# Altium PCB MB1137.PcbDoc (part 3 of 4)
Units mil, origin at the board's own origin, x right, y up, seen from the top; angles counter-clockwise.
Board outline 2760.94 x 5254.68 mil, 6 copper layers (Top Layer, GND, Signal, PWR, GND (Mid2), Bottom Layer), stack 74.545 mil thick; 293 components, 281 nets, 1134 pads, 921 vias.
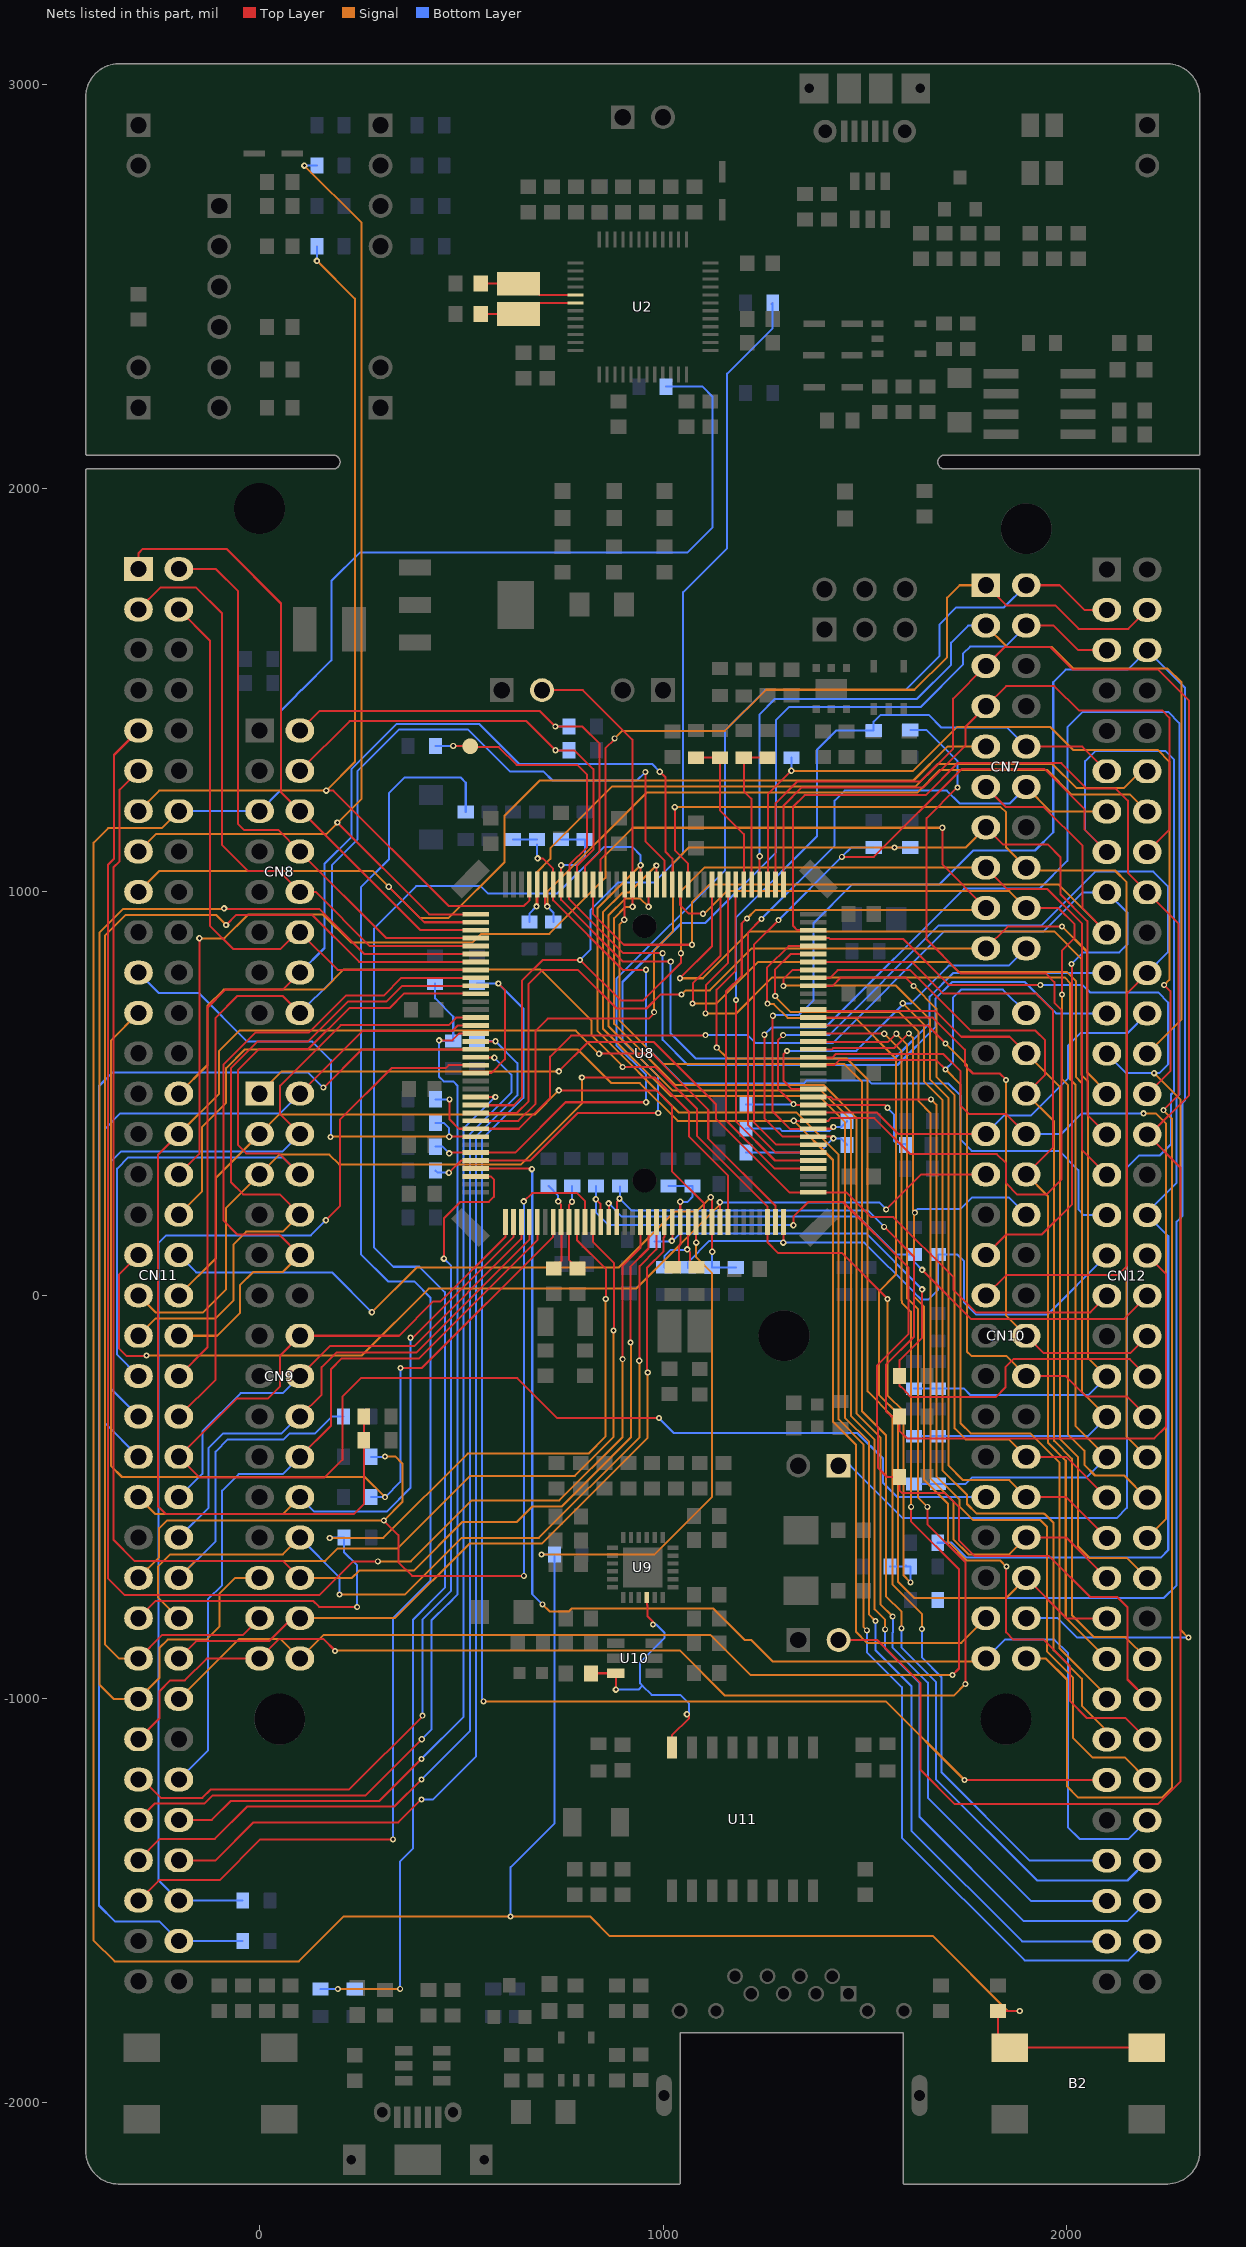
[diagram p7: the nets of this part, all layers, seen from the top]

## Via types
v1: diameter 16, hole 8, Top Layer to Bottom Layer, tented both sides, 464 vias
v2: diameter 15, hole 8, Top Layer to Bottom Layer, tented both sides, 415 vias
v3: diameter 20, hole 12, Top Layer to Bottom Layer, tented both sides, 39 vias
v4: diameter 25.98, hole 12.99, Top Layer to Bottom Layer, tented both sides, 2 vias
v5: diameter 15, hole 8, Top Layer to Bottom Layer, 1 vias

## Nets (pads, with @x,y where several pads share a name; then routed paths per layer and width w, separated by ;. In a path a pad name is that pad's centre, name@x,y a point inside that pad or via, vN(x,y) a via of type N, cw(c..) or ccw(c..) an arc to the next point about the centre after c; other vN are vias at no path point) (continued)
NRST: B2.2 B2.3 C53.2 CN8.5 CN11.14 SB111.2 SB177.1 U8.25 | length 10367.8
  Top Layer w5: v1@1081.95,134 U8.25@1081.95,181.69 ; v1(1884,-1773.5) C53.2@1830,-1773.5 1830,-1835.69 B2.2@1858.72,-1864.42 B2.3@2199.28,-1864.42
  Signal w5: CN11.14@-200,1200 -242.03,1157.97 -375.03,1157.97 -411,1122 -411,-1599 -359.4,-1650.6 97.4,-1650.6 209,-1539 v2(622,-1539) 818.86,-1539 868.07,-1588.21 1669.21,-1588.21 1854.5,-1773.5 v1(1884,-1773.5) ; v2(699,-642) 979.21,-642 1121,-500.21 1121,55.91 1081.95,94.95 v1@1081.95,134
  Bottom Layer w5: CN11.14@-200,1200 CN8.5@0,1200 53.17,1253.17 53.17,1449.17 91.6,1487.6 91.6,1489.04 102.96,1500.4 104.4,1500.4 178,1574 178,1770.5 248.5,1841 1060,1841 1122,1903 1122,2227.85 1097.85,2252 SB111.2@1007.75,2252 ; v2(622,-1539) 622,-1417 731.25,-1307.75 SB177.1@731.25,-642 v2(699,-642)
  other v1: 1082,131
OSC_IN: C5.1 U2.5 X1.2 | length 245.1
  Top Layer w5: C5.1@548.5,2508 X1.2@641.4,2508 ; X1.2@642,2507.4 665.6,2507.4 693.47,2479.53 U2.5@782.68,2479.53
OSC_OUT: C6.1 U2.6 X1.1 | length 245.1
  Top Layer w5: C6.1@548.5,2432 X1.1@641.4,2432 ; X1.1@642,2432.6 665.6,2432.6 692.84,2459.84 U2.6@782.68,2459.84 U2.6@782.52,2460
PA0: CN11.28 SB179.1 SB180.2 U8.34 | length 3240.6
  Top Layer w5: v5(900,566) 980.34,566 1084.3,462.04 1084.3,394.85 1259.12,220.03 U8.34@1259.12,181.69 1259.12,131.04 1284.74,105.42 1442.58,105.42 1557,-9 v2(1556,-9)
  Signal w5: CN11.28@-200,500 -129,571 -129,718 -89.03,757.97 158.97,757.97 209.1,808.1 695.91,808.1 823,681.01 823,644.77 900,567.77 v5(900,566) ; v2(1556,-9) 1556,-247.44 1596.1,-287.54 1596.1,-694.1 v2(1613,-711)
  Bottom Layer w5: SB180.2@1562.75,-672 SB179.1@1613.25,-672 1613.25,-710.75 v2(1613,-711) ; SB179.1@1601,-669 SB179.1@1602,-670
PA1: CN11.30 SB11.2 SB13.2 U8.35 | length 3583.2
  Top Layer w5: CN11.30@-200,400 -252,348 -252,-522 -231.97,-542.03 233.72,-542.03 258.25,-517.5 SB13.2@258.25,-374 ; SB13.2@258.25,-359 SB11.2@258.25,-299.97 ; v1@841.33,600 971.77,600 1112,459.77 1112,388.36 1278.8,221.56 U8.35@1278.8,181.69
  Signal w5: CN11.30@-200,400 -100,500 -100,606 -50,656 783.72,656 v1@840.72,599
  other v1: 841.33,599
PA2: CN12.35 SB159.1 SB160.2 U8.36 | length 1471.5
  Top Layer w5: v1(1298,131) 1298,134 1298.49,134.49 U8.36@1298.49,181.69
  Bottom Layer w5: SB160.2@1062,67.75 SB160.2@1062,69.75 1062,82.01 1114.99,135 1300.04,135 v1@1304.04,131 ; v1(1298,131) v1@1304.04,131 ; CN12.35@2100,99 1954,-47 1775.25,-47 1746,-17.75 1746,85 1729.75,101.25 SB159.1@1681,101.25 1681,13 1658,-10 1639.26,-10 1622.6,6.66 1622.6,7.4 1499,131 v1@1304.04,131
PA3: CN9.1 CN12.37 U8.37 | length 2488.6
  Top Layer w5: v1(742,555) 815,628 977.3,628 1131,474.3 1131,437.31 1313.61,254.7 1371.49,254.7 U8.37@1372.31,255.51 1454.49,255.51 1515.9,194.1 1570.9,194.1 1720,45 1720,13.13 1775.16,-42.03 1917.41,-42.03 ; 1917.44,-42 2059,-42 CN12.37@2100,-1
  Signal w5: CN9.1@0,500 55,555 v1(742,555)
PA4: CN7.17 CN11.32 U8.40 | length 4286.7
  Top Layer w5: CN11.32@-200,300 -149,351 v1(-149,885) ; v2(1208,934) 1207,934 1195,922 1195,792.38 1156,753.38 1156,434.54 1275.84,314.7 1372.18,314.7 U8.40@1372.31,314.57 ; v2(1692,1159) 1692,1068 CN7.17@1800,960
  Signal w5: v1(-149,885) -87,885 -28,944 157,944 227,874 527,874 549,896 718,896 857,1035 857,1091.28 924.72,1159 v2(1692,1159) ; v2(1208,934) 1229.52,955.52 1795.52,955.52 CN7.17@1800,960
  Bottom Layer w5: v2@1207,934 v2(1208,934)
PA5: CN7.10 CN12.11 SB119.2 U8.41 | length 2064.8
  Top Layer w5: v2(1181,732) 1181,430.75 1277.5,334.25 U8.41@1372.31,334.25 ; CN7.10@1900,1360 2039,1360 CN12.11@2100,1299
  Bottom Layer w5: v2(1181,732) 1183.5,732 1181,734.5 1181,937.47 1382,1138.47 1382,1353 1429,1400 SB119.2@1522,1400 1522,1422 1539,1439 1658,1439 1690,1407 1853,1407 CN7.10@1900,1360
PA6: CN7.12 CN12.13 U8.42 | length 1823.9
  Top Layer w5: v2(1244,933) 1210,899 1210,422.96 1279.03,353.94 U8.42@1372.31,353.94
  Signal w5: CN7.12@1900,1260 1961,1199 CN12.13@2100,1199
  Bottom Layer w5: v2(1244,933) 1425,1114 1425,1226 1450,1251 1703.05,1251 1735.05,1219 1859,1219 CN7.12@1900,1260
PA7: CN12.15 JP6.1 SB121.2 U8.43 | length 5093.1
  Top Layer w5: v2(1286.03,930) 1225,868.97 1225,429.18 1280.56,373.62 U8.43@1372.31,373.62 ; v2(1443.03,1087) 1522.65,1087 1740.82,1305.17 1944.83,1305.17 2044,1206 2044,1155 CN12.15@2100,1099
  Bottom Layer w5: v2(1286.03,930) v2(1443.03,1087) 1466.03,1110 SB121.2@1522,1110 ; JP6.1@1409.99,-422 JP6.1@1435,-422 1464,-422 1594,-552 2124,-552 2149.6,-526.4 2149.6,316.6 2180,347 2231.53,347 2258.9,374.37 2258.9,497.88 2265.9,504.87 2265.9,1328.63 2245.53,1349 2071,1349 2046,1324 2046,1153 CN12.15@2100,1099
PA8: CN12.23 SB115.2 TP1.1 U8.100 | length 2527.4
  Top Layer w5: v2(480,1362) 481,1361 TP1.1@522,1361 ; TP1.1@522,1359 TP1.1@522,1361 ; TP1.1@522,1366 TP1.1@522,1361 ; v2(999,848) 900.92,848 766.99,981.93 U8.100@766.99,1018.31 767.81,1019.12 767.81,1066.81 812,1111 812,1290 787,1315 637,1315 593,1359 524,1359 TP1.1@522,1361
  Bottom Layer w5: SB115.2@435.75,1362 v2(480,1362) ; v2(999,848) 999,633.26 1061.26,571 1581,571 1675,665 1675,735.29 1716.49,776.78 1896.56,776.78 1974.34,699 CN12.23@2100,699
PA9: CN12.21 SB127.2 SB128.2 U8.101 | length 2003.2
  Top Layer w5: v1(747.31,1066.32) U8.101@747.31,1018.31 747.31,980.4 900.71,827 v2(1019,827)
  Bottom Layer w5: v1(747.31,1066.32) 786.58,1066.32 806,1085.73 SB127.2@806,1130.25 SB128.2@747,1130.25 SB128.2@747.31,1129.94 ; v2(1019,827) 1019,649 1080.9,587.1 1573.62,587.1 1660.52,674 1660.52,740.46 1719.05,799 CN12.21@2100,799
PA10: CN12.33 SB125.2 SB126.2 U8.102 | length 2156.6
  Top Layer w5: v1(689,1083) 702,1083 727.62,1057.38 U8.102@727.62,1018.31 727.62,978.87 899.49,807 v2(958,807)
  Bottom Layer w5: SB125.2@628.42,1130.25 SB126.2@688,1130.25 ; v1@688,1083.72 SB126.2@688,1117.5 ; v2(958,807) 958,615.69 1048.69,525 1348.5,525 1356.5,533 1509,533 1517,525 1707.42,525 1737.5,494.92 1737.5,385.25 1764.75,358 1981.49,358 2029,310.49 2029,213 2043,199 CN12.33@2100,199
PA11: CN12.14 SB133.2 U8.103 | length 1791.9
  Top Layer w5: U8.103@707.94,1018.31 707.94,969.06 v1(713,964)
  Signal w5: v1(713,964) 713,1000 959,1246 1630,1246 1686.03,1302.03 1951.97,1302.03 2012.03,1241.97 2157.03,1241.97 CN12.14@2200,1199
  Bottom Layer w5: v1(713,964) 728,949 SB133.2@728,925.5
PA12: CN12.12 SB132.2 U8.104 | length 1868
  Top Layer w5: v1(686.28,964) 688.25,965.97 U8.104@688.25,1018.31
  Signal w5: v1(686.28,964) 686.28,1047.28 720.73,1081.73 720.73,1108.43 873.3,1261 1625.34,1261 1681.37,1317.03 1939.54,1317.03 1939.96,1316.6 1956.04,1316.6 1956.46,1317.03 1964.97,1317.03 2025.03,1256.97 2142.03,1256.97 2184.06,1299 CN12.12@2200,1299
  Bottom Layer w5: SB132.2@668.57,925.5 668.57,946.28 v1(686.28,964)
PA13: CN11.13 SB108.1 U8.105 | length 2571.8
  Top Layer w5: v1(165,1251) 183,1251 469,965 655,965 668.57,978.57 U8.105@668.57,1018.31
  Signal w5: CN11.13@-300,1200 -249,1251 v1(165,1251) 236,1322 236,2470 v1(142.25,2563.75)
  Bottom Layer w5: SB108.1@142.25,2600 v1(142.25,2563.75) v1@143,2563
PA14: CN11.15 SB103.1 U8.109 | length 2705.2
  Top Layer w5: v1@193,1174 v1(193,1172.03) 420.54,944.49 U8.109@535.69,944.49
  Signal w5: CN11.15@-300,1100 -257.03,1142.97 164.97,1142.97 253,1231 253,2658.06 v1(111.06,2800)
  Bottom Layer w5: v1(111.06,2800) SB103.1@142.25,2800
PA15: CN7.9 CN11.17 U8.110 | length 2665.6
  Top Layer w5: v1(320,1013) 408.2,924.8 U8.110@535.69,924.8
  Signal w5: CN11.17@-300,1000 -248,1052 281,1052 v1(320,1013) 398,935 468,935 607,1074 607,1189 694,1276 1620.69,1276 1704.69,1360 CN7.9@1800,1360
PB0: CN10.31 CN11.34 SB120.1 U8.46 | length 5869.6
  Top Layer w5: v1(1324,432.68) U8.46@1372.31,432.68 1409.37,432.68 1416,439.3 1523.88,439.3 1613.24,349.94 1827.31,349.94 1850,327.25 1850,278 1878.06,249.94 1949.94,249.94 1988,288 1988,706.64 1969.53,725.11 1969.53,776.47 1948,798 1737,798 1653,882 1653,1182.87 1729.13,1259 v2(1730,1259)
  Signal w5: CN11.34@-200,200 -142.12,257.88 -142.12,417.88 -83,477 -83,563 -36.5,609.5 788.66,609.5 872.16,526 942.62,526 1035.95,432.68 v1(1324,432.68) 1421.1,335.58 1421.1,-313.12 1478.1,-370.12 1478.1,-834.04 1505.06,-861 1739,-861 CN10.31@1800,-800
  Bottom Layer w5: SB120.1@1612.75,1401.75 1651.75,1401.75 1730,1323.5 v2(1730,1259)
PB1: CN10.7 CN12.24 U8.47 | length 1022
  Top Layer w5: U8.47@1372.31,452.36 1373.15,453.2 1529.64,453.2 1582.84,400 CN10.7@1800,400
  Bottom Layer w5: CN10.7@1800,400 1846,446 1912,446 2003,537 2003,619 2034,650 2151,650 CN12.24@2200,699
PB2: CN10.15 CN12.22 R73.1 SB137.2 U8.48 | length 3207.7
  Top Layer w5: 1298.5,498.55 1325,472.05 U8.48@1372.31,472.05 1548.95,472.05 v2(1556,465) v2@1557,465 ; v2@1298.5,644.28 v2(1297.78,645) 1284.6,631.82 1284.6,512.4 v2(1323,474) ; CN10.15@1800,0 1850,50 2126,50 2150,74 2150,749 CN12.22@2200,799
  Bottom Layer w5: SB137.2@1205.75,473 1324.05,473 1324,473.05 1324,474 v2(1323,474) ; v2(1297.78,645) 1411.45,645 1683.48,917.03 1938.03,917.03 2071,1050 2215,1050 2251,1014 2251,850 CN12.22@2200,799 ; v2(1556,465) 1572.87,448.13 1572.87,382.13 1580,375 1600.5,375 R73.1@1602.5,373
PB3: CN7.15 CN12.31 SB110.2 U8.133 | length 4690.2
  Top Layer w5: U8.133@536.51,471.23 630.23,471.23 650,491 650,779.75 701.25,831 v2(794,831) 795.28,831 895.28,731 951.28,731 1044.07,823.79 v2(1044.07,848) ; CN7.15@1800,1060 1853,1007 1952.69,1007 2037.85,921.84 2037.85,361.16 CN12.31@2100,299
  Signal w5: v2(1044.07,848) 1044.07,1001.74 1102.33,1060 CN7.15@1800,1060
  Bottom Layer w5: v2(794,831) 819.7,856.7 819.7,954.7 888,1023 977,1023 1049.71,1095.71 1049.71,1742.71 1159,1852 1159,2284.39 1271.75,2397.14 SB110.2@1271.75,2460 SB110.2@1269,2457.25
PB4: CN7.19 CN12.27 U8.134 | length 2357.3
  Top Layer w5: U8.134@535.69,452.36 638,452.36 667,481.36 667,772.01 701.99,807 788.99,807 884.99,711 959,711 994,746 v2(1046,746) ; CN7.19@1800,860 1854,914 v2(1989,914)
  Signal w5: v2(1046,746) 1056,756 1115.75,756 1219.75,860 CN7.19@1800,860 ; v2(1989,914) 2050.7,852.3 2050.7,552.93 2100,503.63 CN12.27@2100,499
  Bottom Layer w5: CN12.27@2100,499 CN12.27@2100,501
PB5: CN7.13 CN12.29 SB122.2 U8.135 | length 2851.4
  Top Layer w5: U8.135@535.69,432.68 641.31,432.68 684,475.36 684,656 714,686 965,686 978,699 v2(978,702) ; CN7.13@1800,1160 1843,1117 1954.35,1117 1985,1086.35 1985,994.34 2051.75,927.6 2051.75,447.26 CN12.29@2100,399
  Signal w5: v2(978,702) 978,855.28 1025,902.28 1025,1071 1064,1110 v2(1573.62,1110) 1750,1110 CN7.13@1800,1160
  Bottom Layer w5: v2(1573.62,1110) SB122.2@1612.75,1110
PB6: CN10.13 CN12.17 SB136.2 U8.136 | length 3216.7
  Top Layer w5: v2(471,485.95) 471,435.99 494,412.99 U8.136@535.69,412.99 642.84,412.99 720,490.15 720,591.98 772.02,644 1104,644 v2(1105,645) ; CN10.13@1800,100 1851,151 1939,151 2013,225 2013,820.03 v2(2012.03,821)
  Signal w5: CN12.17@2096.97,1002.03 CN12.17@2100,999
  Bottom Layer w5: SB136.2@435.75,486 470.95,486 v2(471,485.95) ; v2(1105,645) 1210,645 1228.9,626.1 1421.37,626.1 1697.3,902.03 1943.03,902.03 2040,999 CN12.17@2100,999 2151,948 2151,869.99 2131.01,850 2041.03,850 v2(2012.03,821)
PB7: CN11.21 SB139.1 U8.137 | length 1171.2
  Top Layer w5: v1@477,393.31 U8.137@535.69,393.31
  Signal w5: v2(176,392.5) 177,393.5 v1@470,393.5
  Bottom Layer w5: CN11.21@-300,800 -249.5,749.5 -150.5,749.5 -30,629 96,629 130.69,629 176.9,582.79 176.9,393.4 v2(176,392.5) ; SB139.1@436,427 457.28,427 461.3,422.97 470,414.28 v1(470,393)
PB8: CN7.2 CN12.3 SB138.2 U8.139 | length 2811.6
  Top Layer w5: v1(470,352) 471.94,353.94 U8.139@535.69,353.94 633.5,353.94 758.27,478.7 v1(958,478.7) ; CN7.2@1900,1760 1983,1760 2044,1699 CN12.3@2100,1699
  Bottom Layer w5: SB138.2@435.75,368.5 453.5,368.5 v1(470,352) ; v1(958,478.7) 958,546.76 884.49,620.26 884.49,784.49 1154,1054 1154,1400.91 1252.86,1499.78 1599.78,1499.78 1684.5,1584.5 1684.5,1662.59 1726.91,1705 1845,1705 CN7.2@1900,1760
PB9: CN7.4 CN12.5 SB143.2 U8.140 | length 2776.8
  Top Layer w5: v1@469.32,304.25 499.31,334.25 U8.140@535.69,334.25 671.25,334.25 789,452 v1(988,452) ; CN7.4@1900,1660 1968,1660 2029,1599 CN12.5@2100,1599
  Bottom Layer w5: SB143.2@435.75,309.5 441.25,304 v1(469.32,304) ; v1(988,452) 988,543.26 899.49,631.76 899.49,776.78 1045.72,923 1104.94,923 1280,1098.06 1280,1426.12 1311.88,1458 1638,1458 1743.93,1563.93 1743.93,1590.93 1761,1608 1848,1608 CN7.4@1900,1660
PB10: CN10.32 CN12.25 U8.69 | length 3135.7
  Top Layer w5: U8.69@1372.31,885.43 1411.57,885.43 1413.5,883.5 1594.56,883.5 1709.06,769 v2(1935,769)
  Signal w5: v1(2217,551) 2282,486 2282,-828 v2(2302,-848)
  Bottom Layer w5: CN10.32@1900,-800 1978,-800 2026,-848 v2(2302,-848) ; v2(1935,769) 2040,769 2058,751 2226.79,751 2252,725.79 2252,573 2230,551 v1(2217,551) 2148,551 CN12.25@2100,599
PB11: CN10.34 CN12.18 U8.70 | length 4454.3
  Top Layer w5: U8.70@1372.31,905.12 1332.88,905.12 1322.1,915.9 1322.1,1211.1 1351,1240 1650.69,1240 1729.76,1319.07 1986.83,1319.07 2049.91,1256 2122,1256 2152,1226 2152,1047 CN12.18@2200,999 2278,921 2278,496.99 v2(2240,459)
  Signal w5: CN10.34@1900,-900 1949,-900 2001,-952 2001,-1217 2027.97,-1243.97 2237.03,-1243.97 2261,-1220.01 2261,438 v2(2240,459)
PB12: CN7.7 CN12.16 U8.73 | length 1690.4
  Top Layer w5: U8.73@1298.49,1018.31 1298.5,1213.96 1343.39,1258.85 1645.84,1258.85 1750,1363.01 1750,1410 CN7.7@1800,1460 1850,1510 1970,1510 2031,1449 2238,1449 2255,1432 2255,1154 CN12.16@2200,1099
PB13: CN7.5 CN12.30 JP7.2 U8.74 | length 5439.3
  Top Layer w5: U8.74@1278.8,1018.31 1278.8,1219.93 1332.45,1273.57 1637.91,1273.57 1719,1354.66 1719,1479 CN7.5@1800,1560 1847,1607 1959.06,1607 2015.06,1551 2226.79,1551 2304,1473.79 2304,496.26 2206.74,399 CN12.30@2200,399 2282,317 2282,-1205 2226.93,-1260.07 2077.14,-1260.07 2076.49,-1260.72 1722.72,-1260.72 1638.15,-1176.15 1638.15,-961.35 1530.8,-854 JP7.2@1435,-854
PB14: CN12.28 SB118.1 U8.75 | length 2214.4
  Top Layer w5: U8.75@1259.93,1019.12 1259.93,1241.93 v1(1318,1300) ; CN12.28@2200,499 2257,556 2257,754.03 v2(2242.03,769)
  Signal w5: v1(1318,1300) 1620,1300 1729,1409 1959,1409 2016,1352 2226,1352 2255,1323 2255,781.97 v2(2242.03,769)
  Bottom Layer w5: v1(1318,1300) SB118.1@1318,1332.5
PB15: CN7.3 CN12.26 U8.76 | length 2604.3
  Top Layer w5: U8.76@1239.43,1018.31 v1(1239.43,1088.43)
  Signal w5: CN7.3@1800,1660 1853,1607 1963,1607 2016,1554 2250,1554 2285,1519 2285,684 CN12.26@2200,599
  Bottom Layer w5: v1(1239.43,1088.43) 1239.43,1440.12 1277.31,1478 1629,1478 1714,1563 1714,1618 1756,1660 CN7.3@1800,1660
PC0: CN9.3 CN11.38 U8.26 | length 1886
  Top Layer w5: v1(742,508) 983,508 1022,469 1022,307.43 1101.64,227.79 U8.26@1101.64,181.69
  Signal w5: CN11.38@-200,0 -108,92 -108,292 CN9.3@0,400 48,448 682,448 v1(742,508)
PC1: CN11.36 SB164.2 SB165.2 U8.27 | length 1732.7
  Top Layer w5: v1@1118.1,246.96 v1(1118.1,243) 1121.32,239.78 U8.27@1121.32,181.69 ; U8.27@1120.51,182.51 U8.27@1121.32,181.69 ; v1@1121.32,108.68 U8.27@1121.32,181.69
  Signal w5: v1(278.53,-42.03) 389.75,69.19 890.19,69.19 1028.43,207.43 1082.53,207.43 v1(1118.1,243)
  Bottom Layer w5: CN11.36@-200,100 -157.03,57.03 179.47,57.03 v1(278.53,-42.03) ; v1@1121.53,107.53 1121.53,69.56 SB165.2@1180.53,69.56
  other v1: 1122,108
PC2: CN10.9 CN11.35 U8.28 | length 2668.5
  Top Layer w5: CN11.35@-300,100 -348.03,51.97 -348.03,-131.97 -330,-150 -281,-150 v2(-280,-149) ; U8.28@1141.01,181.69 v1(1141.01,230.69) ; v2(1553,213) 1640,300 CN10.9@1800,300
  Signal w5: v2(-280,-149) 253,-149 419,17 932.99,17 1141.01,225.02 v1(1141.01,230.69)
  Bottom Layer w5: v1(1141.01,230.69) 1535.31,230.69 v2(1553,213) ; CN10.9@1800,300 CN10.9@1807.72,300
PC3: CN9.5 CN11.37 U8.29 | length 2114.2
  Top Layer w5: v1(799,540) 979.69,540 1064,455.69 1064,394 1161.51,296.49 1161.51,216
  Signal w5: CN11.37@-300,0 -257.97,-42.03 -140.03,-42.03 -83,15 -83,217 CN9.5@0,300 49,349 173,349 197.5,324.5 648.5,324.5 799,475 v1(799,540)
PC4: CN12.34 SB150.2 SB151.1 SB178.2 U8.44 | length 4934.2
  Top Layer w5: v2(1251,646) 1251,439.3 1297,393.31 U8.44@1372.31,393.31 1417.89,393.31 v1(1422.2,389)
  Bottom Layer w5: SB150.2@1205.75,354 1387.2,354 v1(1422.2,389) 1440.25,389 SB151.1@1456.25,373 ; v2(1251,646) 1269,664 1402,664 1746,1008 1933,1008 2002,1077 2002,1408 2040,1446 2252,1446 2279.8,1418.2 2279.8,497.56 2272.8,490.56 2272.8,279.01 2200,206.2 CN12.34@2200,199 2252,147 2252,-631 2233,-650 1752,-650 1715,-613 SB178.2@1680.75,-613
PC5: CN12.6 SB140.2 SB141.1 SB181.2 U8.45 | length 5272.9
  Top Layer w5: v2@1270.7,692.7 1270.7,456.99 1315.51,412.18 1371.49,412.18 U8.45@1372.31,412.99 1417.89,412.99 v1(1422.2,417.3)
  Bottom Layer w5: SB140.2@1205.75,414 1288.75,414 1295.75,407 1411.21,407 1421.5,417.3 v1(1422.2,417.3) 1441.55,417.3 SB141.1@1456.25,432 ; v2@1273,695 1336,695 1373,732 1373,923 1467.99,1017.99 1683.89,1017.99 1768.51,1102.61 1921.79,1102.61 1967.03,1147.84 1967.03,1520.03 1998,1551 2152,1551 CN12.6@2200,1599 2293.7,1505.3 2293.7,483.43 2286.7,476.43 2286.7,196.7 2273,183 2273,-718 2241,-750 SB181.2@1680.75,-750
  other v2: 1272,693
PC6: CN7.1 CN12.4 U8.96 | length 2003.8
  Top Layer w5: U8.96@845.5,1018.54 845.5,1080.86 857,1092.36 857,1355.5 880,1378.5 v2(880,1380.53) ; CN7.1@1800,1760 1850,1710 1972,1710 2030,1652 2153,1652 CN12.4@2200,1699
  Signal w5: v2(880,1380.53) 898.47,1399 1153.37,1399 1255.37,1501 1623,1501 1704,1582 1704,1729 1735,1760 CN7.1@1800,1760
PC7: CN7.11 CN12.19 U8.97 | length 2091.4
  Top Layer w5: U8.97@826.05,1018.31 826.05,945.76 902.8,869 v2(1071.47,869) ; CN7.11@1800,1260 1849.84,1210.16 1943.84,1210.16 2040,1114 2040,959 CN12.19@2100,899
  Signal w5: v2(1071.47,869) 1071.47,974.47 1114.97,1017.97 1981.03,1017.97 CN12.19@2100,899
PC8: CN8.2 SB116.1 U8.98 | length 1194
  Top Layer w5: CN8.2@100,1400 148,1448 695,1448 v2(733,1410) 800,1410 842,1368 842,1098.57 806.36,1062.94 U8.98@806.36,1018.31
  Bottom Layer w5: v2(733,1410) SB116.1@767.5,1410
PC9: CN8.4 SB117.1 U8.99 | length 1163.6
  Top Layer w5: CN8.4@100,1300 223,1423 661.5,1423 v2(733.5,1351) 780,1351 827,1304 827,1104.79 786.68,1064.46 U8.99@786.68,1018.31
  Bottom Layer w5: v2(733.5,1351) SB117.1@767.5,1351
PC10: CN8.6 CN11.1 U8.111 | length 1544.8
  Top Layer w5: CN11.1@-300,1800 -300,1839 -289,1850 -82,1850 53.17,1714.83 53.17,1246.83 CN8.6@100,1200 103.99,1200 398.87,905.12 U8.111@535.69,905.12
PC11: CN8.8 CN11.2 U8.112 | length 1452.5
  Top Layer w5: CN11.2@-200,1800 -108,1800 -53,1745 -53,1168 -39,1154 46,1154 CN8.8@100,1100 314.57,885.43 U8.112@535.69,885.43
PC12: CN8.10 CN11.3 U8.113 | length 1562.2
  Top Layer w5: CN11.3@-300,1700 -246,1754 -157,1754 -93,1690 -93,1116 -29,1052 48,1052 CN8.10@100,1000 139,1000 273.25,865.75 U8.113@535.69,865.75
PC13: CN11.23 SB173.1 U8.7 | length 2783.4
  Top Layer w5: v2(349,-180) 402.31,-180 727.62,145.31 U8.7@727.62,181.69
  Signal w5: CN11.23@-300,700 -368.73,631.27 -368.73,-422.27 -341,-450 261,-450 v2(311,-500)
  Bottom Layer w5: SB173.1@275.75,-500 v2(311,-500) 349,-462 v2(349,-180)
PC14: R37.2 SB144.1 U8.8 | length 224.7
  Top Layer w5: R37.2@729,66.75 748.12,85.87 748.12,180.88 U8.8@747.31,181.69 747.31,224.63 v1@740,231.94
  Bottom Layer w5: SB144.1@716,271.25 740,247.25 v1(740,233)
PC15: R38.2 SB145.1 U8.9 | length 216
  Top Layer w5: v1(774.3,231.94) 766.99,224.63 U8.9@766.99,181.69 766.99,87.5 R38.2@788,66.5
  Bottom Layer w5: v1(774.3,231.94) SB145.1@774.3,270.8
PD0: CN9.25 CN11.57 U8.114 | length 3497.2
  Top Layer w5: v1@-89.97,957.97 125.03,957.97 148.03,957.97 259.94,846.06 U8.114@535.69,846.06
  Signal w5: -317.41,957.97 -282.59,957.97 ; -317.44,958 -338,958 -396.53,899.47 -396.53,-965.47 -362,-1000 CN11.57@-300,-1000 -248,-948 -248,-873 -228,-853 -132,-853 -99,-820 -99,-738.21 -60.79,-700 CN9.25@0,-700 ; -282.56,958 -217.44,958 ; -217.41,957.97 -182.59,957.97 ; -182.56,958 -89,958 v1(-88,959)
PD1: CN9.27 CN11.55 U8.115 | length 3204.4
  Top Layer w5: CN11.55@-300,-900 -242.03,-842.03 -42.03,-842.03 CN9.27@0,-800 ; v1(-83,918) -58.03,942.97 130.03,942.97 246.62,826.38 U8.115@535.69,826.38
  Signal w5: -323.65,943 -331.79,943 -382.63,892.16 -382.63,-865.4 -348.03,-900 CN11.55@-300,-900 ; -323.62,942.97 -276.38,942.97 ; -276.35,943 -223.65,943 ; -223.62,942.97 -176.38,942.97 ; -176.35,943 -108,943 v1(-83,918)
PD2: CN8.12 CN11.4 U8.116 | length 1554.4
  Top Layer w5: CN11.4@-200,1700 -123,1623 -123,916.43 -64.54,857.97 51.59,857.97 93.62,900 CN8.12@100,900 193.31,806.69 U8.116@535.69,806.69
PD3: CN9.10 CN11.40 U8.117 | length 1749.3
  Top Layer w5: CN9.10@100,100 49,151 -54.97,151 -89.97,186 -89.97,571.57 -10.54,651 122,651 213.97,742.97 307.41,742.97 351.44,787.01 U8.117@535.69,787.01
  Signal w5: CN11.40@-200,-100 -105,-100 -48,-43 -48,26 -16.03,57.97 57.97,57.97 CN9.10@100,100
PD4: CN9.8 CN11.39 U8.118 | length 1783.7
  Top Layer w5: CN9.8@100,200 49.5,250.5 -40.55,250.5 -71,280.95 -71,563.24 -5.24,629 119.66,629 218.63,727.97 313.97,727.97 353.32,767.32 U8.118@535.69,767.32
  Signal w5: CN11.39@-300,-100 -257.03,-57.03 -109.03,-57.03 -65.01,-13.01 -65.01,125.96 -33,157.97 57.97,157.97 CN9.8@100,200
PD5: CN9.6 CN11.41 U8.119 | length 2055.4
  Top Layer w5: CN9.6@100,300 48,352 -33,352 -54,373 -54,558 -1,611 121.32,611 222.32,712 322,712 357.64,747.64 U8.119@535.69,747.64
  Bottom Layer w5: CN11.41@-300,-200 -352.95,-147.05 -352.95,314.05 -324.97,342.03 57.97,342.03 CN9.6@100,300
PD6: CN9.4 CN11.43 U8.122 | length 1851.1
  Top Layer w5: CN9.4@100,400 51,449 51,520 201,670 468.73,670 487.31,688.58 U8.122@535.69,688.58
  Bottom Layer w5: CN11.43@-300,-300 -367.95,-232.05 -367.95,332.05 -342.97,357.03 57.03,357.03 CN9.4@100,400
PD7: CN9.2 CN11.45 U8.123 | length 1872
  Top Layer w5: CN9.2@100,500 255,655 477,655 490.9,668.9 U8.123@535.69,668.9
  Bottom Layer w5: CN11.45@-300,-400 -382.95,-317.05 -382.95,413 -344.95,451 51,451 CN9.2@100,500
PD8: SB5.2 SB7.2 U8.77 | length 380.2
  Top Layer w5: U8.77@1218.93,1019.12 1218.93,1230.93 1200,1249.87 SB5.2@1200,1332.5 SB7.2@1259,1332.5
PD9: SB4.1 SB6.2 U8.78 | length 397.6
  Top Layer w5: SB4.1@1082,1332.5 SB6.2@1141,1332.5 1141,1202 1200,1143 U8.78@1200.06,1018.31
PD10: CN12.65 U8.79 | length 3123.6
  Top Layer w5: v2(1133,614) 1133,757.8 1180,804.8 U8.79@1180,1017.93
  Signal w5: v2(1133,614) 1159.9,587.1 1454.89,587.1 1507,534.99 1507,-237.75 1568.3,-299.05 1568.3,-716.3 1641.25,-789.25 v2(1641.25,-827)
  Bottom Layer w5: v2(1641.25,-827) 1641.25,-897.25 1690,-946 1690,-1182 1909,-1401 CN12.65@2100,-1401
PD11: CN12.45 SB174.2 SB175.1 U8.80 | length 2987.1
  Top Layer w5: v2(1105,699) 1106,700 1106,769 1160.69,823.69 U8.80@1160.69,1018.31
  Signal w5: v2(1105,699) 1182,699 1271,788 1995,788 2009,774 2009,535.66 2022,522.66 2022,-323 CN12.45@2100,-401
  Bottom Layer w5: 1642,-467 1750,-467 1766,-451 2050,-451 CN12.45@2100,-401
PD12: CN12.43 SB171.2 SB172.1 U8.81 | length 2924.6
  Top Layer w5: v2(1073,723.7) 1074,724.7 1074,773.38 1141.82,841.2 U8.81@1141.82,1017.49
  Signal w5: v2(1073,723.7) 1132.7,723.7 1235.38,826.38 1706.8,826.38 1731.28,801.9 2000.76,801.9 2022.9,779.76 2022.9,541.42 2038,526.32 2038,-239 CN12.43@2100,-301
  Bottom Layer w5: 1642,-349 1701,-349 2052,-349 CN12.43@2100,-301
PD13: CN12.41 SB167.2 SB168.1 U8.82 | length 2901.8
  Top Layer w5: v2(1041.69,785.99) 1121.32,865.62 U8.82@1121.32,1018.31
  Signal w5: v2(1041.69,785.99) 1098.6,785.99 1214.63,902.03 1817.41,902.03 ; 1817.44,902 1882.56,902 ; 1882.59,902.03 1968.97,902.03 2036.8,834.2 2036.8,547.17 2053,530.97 2053,-154 CN12.41@2100,-201
  Bottom Layer w5: SB167.2@1621.75,-231.25 1701,-231.25 1746.25,-231.25 1762,-247 2054,-247 CN12.41@2100,-201
PD14: CN7.16 CN12.46 U8.85 | length 2902.9
  Top Layer w5: v1@1026,1213.37 v1(1029.21,1210.16) 1029.21,1103.09 1061.45,1070.85 U8.85@1061.45,1019.12
  Signal w5: v1(1029.21,1210.16) 1836.84,1210.16 1850,1197 1850,1110 CN7.16@1900,1060 1907,1053 2120,1053 2148.97,1024.03 2148.97,-349.97 CN12.46@2200,-401
PD15: CN7.18 CN12.48 U8.86 | length 2663.1
  Top Layer w5: U8.86@1042.58,1018.31 1042.58,967.42 1064,946 v1(1098.94,946) ; CN7.18@1900,960 1980.03,960 2020,920.03 2020,886 1989,855 v2(1989,746)
  Signal w5: v1(1098.94,946) 1101.73,946 1157.76,1002.03 1857.97,1002.03 CN7.18@1900,960 CN7.18@1902.5,957.5 ; v2(1989,746) 1989,536 2003,522 2003,-344 2044,-385 2044,-420 2070.41,-446.41 2142.97,-446.41 2197.56,-501 CN12.48@2200,-501
PE0: CN10.33 CN12.64 U8.141 | length 3293.3
  Top Layer w5: U8.141@535.69,314.57 673.43,314.57 v1(675,313)
  Signal w5: v2(701,-765.53) 718.87,-783.4 766.33,-783.4 773.73,-776 1124.27,-776 1202.27,-854 1219,-854 1272.53,-907.53 1792.47,-907.53 CN10.33@1800,-900
  Bottom Layer w5: v1(675,313) 676,313 675.81,312.81 675.81,-740.34 v2(701,-765.53) ; CN10.33@1800,-900 1847,-853 1970,-853 2003,-886 2003,-1318 2032,-1347 2154,-1347 CN12.64@2200,-1301
PE1: CN11.61 U8.142 | length 2313.9
  Top Layer w5: CN11.61@-300,-1200 -290,-1200 -244.83,-1245.17 -141.74,-1245.17 -121.56,-1225 221.53,-1225 v2@404,-1042.53 ; v1(457,91.25) 457,191.01 497.93,231.94 568.18,231.94 580.67,244.43 580.67,287.33 573.12,294.88 U8.142@535.69,294.88
  Bottom Layer w5: v2(404,-1041.5) 404,-803 475,-732 475,73.25 v1(457,91.25) v1@457.75,92
PE2: CN9.14 CN10.25 CN11.46 U8.1 | length 3487.9
  Top Layer w5: U8.1@609.51,181.69 609.51,145.73 448.79,-15 430.8,-15 345.8,-100 CN9.14@100,-100 51,-149 51,-225 21,-255 -55,-255 CN11.46@-200,-400 -149,-451 161.47,-451 205,-407.47 205,-251 251,-205 639,-205 738,-304 v2(990,-304)
  Bottom Layer w5: v2(990,-304) 1027,-341 1481.74,-341 1545,-404.26 1545,-464 1581,-500 CN10.25@1800,-500
PE3: CN9.22 CN11.47 U8.2 | length 1516.1
  Top Layer w5: v2(374,-105) 380,-105 629.2,144.2 U8.2@629.2,181.69
  Signal w5: CN11.47@-300,-500 -257.97,-542.03 57.97,-542.03 CN9.22@100,-500
  Bottom Layer w5: CN9.22@100,-500 136,-536 315,-536 374,-477 v2(374,-105)
PE4: CN9.16 CN11.48 U8.3 | length 1217.2
  Top Layer w5: CN9.16@100,-200 174,-126 382.96,-126 648.88,139.92 U8.3@648.88,181.69
  Bottom Layer w5: CN11.48@-200,-500 -142,-442 -142,-337.03 -47,-242.03 57.97,-242.03 CN9.16@100,-200
PE5: CN9.18 CN11.50 U8.4 | length 1344.2
  Top Layer w5: CN9.18@100,-300 154,-246 154,-178 191,-141 389.17,-141 668.57,138.39 U8.4@668.57,181.69
  Bottom Layer w5: CN11.50@-200,-600 -126,-526 -126,-378.03 -90,-342.03 54.87,-342.03 96.9,-300 CN9.18@100,-300
PE6: CN9.20 CN11.62 U8.5 | length 1925.6
  Top Layer w5: CN9.20@100,-400 177,-323 177,-183 204,-156 395.39,-156 688.25,136.87 U8.5@688.25,181.69
  Bottom Layer w5: CN11.62@-200,-1200 -128,-1128 -128,-753 -93,-718 -93,-484 -51.97,-442.97 57.03,-442.97 CN9.20@100,-400
PE7: CN10.20 CN12.44 U8.58 | length 1645.8
  Top Layer w5: U8.58@1372.31,668.9 1655.6,668.9 v2@1700.25,624.25 ; CN10.20@1900,-200 1998,-200 2048,-250 2149,-250 CN12.44@2200,-301
  Signal w5: v2(1700,624) 1700.5,624 1753,571.5 1753,-139 1764,-150 1850,-150 CN10.20@1900,-200
PE8: CN10.18 CN12.40 U8.59 | length 1554.8
  Top Layer w5: U8.59@1372.31,688.58 1668.42,688.58 1748,609 1748,570 1768.06,549.94 1834.56,549.94 1850,534.5 v2(1850,534) ; CN10.18@1900,-100 1943.03,-143.03 2157.97,-143.03 CN12.40@2200,-101
  Signal w5: v2(1850,534) 1850,-50 CN10.18@1900,-100
PE9: CN10.4 CN12.52 U8.60 | length 2051.7
  Top Layer w5: U8.60@1372.31,708.27 1375.48,705.1 1675,705.1 1739.1,641 1859,641 CN10.4@1900,600
  Signal w5: CN10.4@1900,600 1984,516 1984,-356 2028,-400 2028,-621 2058,-651 2150,-651 CN12.52@2200,-701
PE10: CN10.24 CN12.47 U8.63 | length 1853.1
  Top Layer w5: U8.63@1372.31,767.32 1420.32,767.32 1441,788 1600,788 v2(1621,767) ; CN10.24@1900,-400 1999,-400 CN12.47@2100,-501
  Signal w5: v2(1621,767) 1677.1,710.9 1677.1,541.4 1722.5,496 1722.5,-329.5 1750.03,-357.03 1823.62,-357.03 ; 1823.65,-357 1857,-357 CN10.24@1900,-400
PE11: CN10.6 CN12.56 U8.64 | length 2377
  Top Layer w5: U8.64@1372.31,787.01 1414.01,787.01 1432.88,805.88 1612.21,805.88 1762.09,656 1923,656 1947,632 1947,547 CN10.6@1900,500
  Signal w5: CN10.6@1900,500 1969,431 1969,-360.66 2013,-404.66 2013,-792 2067.97,-846.97 2145.97,-846.97 CN12.56@2200,-901
PE12: CN10.26 CN12.49 U8.65 | length 2089.3
  Top Layer w5: v2(1298,767) 1298,783.8 1320.9,806.69 U8.65@1372.31,806.69 ; CN10.26@1900,-500 1999,-500 CN12.49@2100,-601
  Signal w5: v2@1299,768 1577,768 1661,684 1661,535.5 1707.5,489 1707.5,-422.09 1743.38,-457.97 1857.97,-457.97 CN10.26@1900,-500
PE13: CN10.10 CN12.55 U8.66 | length 2361.3
  Top Layer w5: U8.66@1372.31,826.38 1616.51,826.38 1694.89,748 1925,748 1966,707 1966,366 CN10.10@1900,300
  Signal w5: CN10.10@1900,300 1954,246 1954,-365.31 1998,-409.31 1998,-799 CN12.55@2100,-901
PE14: CN10.28 CN12.51 U8.67 | length 2316.5
  Top Layer w5: v2(1278,741.79) 1278,808.05 1316.02,846.06 U8.67@1372.31,846.06 ; CN10.28@1900,-600 1999,-600 CN12.51@2100,-701
  Signal w5: v2@1278,739.9 1315.26,702.64 1584.36,702.64 1633.2,653.8 1633.2,481.3 1662.5,452 1662.5,-453.41 1720.3,-511.21 1720.3,-605.3 1757.03,-642.03 1857.97,-642.03 CN10.28@1900,-600
PE15: CN10.30 CN12.53 U8.68 | length 2530.6
  Top Layer w5: v2(1258.7,723) 1258,723.7 1258,812.75 1311,865.75 U8.68@1372.31,865.75 ; CN10.30@1900,-700 2001,-801 CN12.53@2100,-801
  Signal w5: v2@1259.91,721.79 1274.5,721.79 1308.65,687.64 1476.36,687.64 1577.3,586.7 1577.3,51.94 1534.81,9.45 1534.81,-245.9 1582.2,-293.29 1582.2,-710.2 1622,-750 1850,-750 CN10.30@1900,-700
PF0: CN11.53 SB176.2 U8.10 | length 2134.6
  Top Layer w5: CN11.53@-300,-800 -257.03,-757.03 132.5,-757.03 147.47,-772 v2(242,-772) ; U8.10@786.68,181.69 786.68,137 858,65.68 v2(858,-9)
  Signal w5: v2(174,-601) 306.74,-601 515.74,-392 815.28,-392 857,-350.28 v2@857,-10
  Bottom Layer w5: v2(174,-601) 175,-600 SB176.2@209.25,-600 209.25,-636.25 241,-668 241,-771 v2(242,-772)
PF1: CN11.51 SB170.2 U8.11 | length 2545.4
  Top Layer w5: v2(308.03,-557.97) 344,-593.94 344,-661 378,-695 v2(655,-695) ; v1(655,233) 675.5,253.5 787.18,253.5 806.36,234.31 U8.11@806.36,181.69
  Signal w5: CN11.51@-300,-700 -249,-649 -249,-577.03 -229.94,-557.97 v2(308.03,-557.97) 354.24,-511.76 354.24,-417.24 336,-399 v2(311,-399)
  Bottom Layer w5: SB170.2@275.75,-400 v2@310,-400 ; v2(655,-695) v1(655,233)
PF2: CN11.52 SB169.2 U8.12 | length 2479
  Top Layer w5: U8.12@826.05,181.69 826.05,132.63 878,80.68 v2@878,-86
  Signal w5: CN11.52@-200,-700 -157.97,-657.97 163.03,-657.97 194,-627 342,-627 522,-447 781.5,-447 877,-351.5 v2(877,-87)
  Bottom Layer w5: CN11.52@-200,-700 -109,-609 -109,-387.03 -79,-357.03 59.53,-357.03 74.55,-342.01 82.58,-342.01 ; 82.59,-342.03 137.97,-342.03 180,-300 SB169.2@208.25,-300
PF3: CN12.58 SB15.1 SB146.2 U8.13 | length 2625.8
  Top Layer w5: v1(833.58,238.13) 844.5,227.21 844.5,182.93 U8.13@845.73,181.69 ; v1(1323,174) 1323,195 1359.5,231.5 1446,231.5 1608,69.5 1608,-96.25 1530.1,-174.15 1530.1,-323.83 1532.61,-326.34 1532.61,-427.61 1555,-450 SB15.1@1586.25,-450 1586.25,-483.78 1592.47,-490 1698,-490 1733.56,-525.56 1733.56,-607.56 1772,-646 1957,-646 2058,-747 2125,-747 2151,-773 2151,-952 CN12.58@2200,-1001
  Bottom Layer w5: SB146.2@834,271.25 834,205 865,174 v1(1323,174)
PF4: CN12.38 SB158.1 U8.14 | length 1534
  Top Layer w5: U8.14@865.42,181.69 v1@865.42,228 ; v1(1642,63) 1762.97,-57.97 2143.03,-57.97 CN12.38@2200,-1
  Bottom Layer w5: v1(865,228) 898,195 1485,195 1578.75,101.25 SB158.1@1622,101.25 1622,83 v1(1642,63)
PF5: CN12.36 SB14.1 SB147.2 U8.15 | length 2493.4
  Top Layer w5: U8.15@885.5,182.09 885.5,231.5 893,239 v1(892,240) ; v2(1548,170) 1621.9,96.1 1621.9,-102.01 1552,-171.91 1552,-287 1565,-300 SB14.1@1586.25,-300 1586.25,-336.25 1604.5,-354.5 2217.5,-354.5 2247,-325 2247,52 CN12.36@2200,99
  Bottom Layer w5: v1(892,240) v1@893,239 ; SB147.2@893,269.5 v1@893,239 ; v2(1548,170) 1508,210 922,210 v1@893,239
PF6: CN11.9 U8.18 | length 4137.7
  Top Layer w5: CN11.9@-300,1400 -360.73,1339.27 -360.73,1081.76 -375.83,1066.66 -375.83,-701.17 -334.97,-742.03 148.97,-742.03 232,-659 v2(293,-659) ; v2@899,-157 899,72.53 944.16,117.69 U8.18@944.16,181.69
  Signal w5: v2(293,-659) 375,-659 526,-508 743,-508 900,-351 v2(900,-158)
PF7: CN9.26 CN11.11 U8.19 | length 3948.1
  Top Layer w5: CN11.11@-300,1300 -346.83,1253.17 -346.83,1076 -361.93,1060.91 -361.93,-606.1 -310.06,-657.97 57.97,-657.97 CN9.26@100,-700 ; v2(919,-117) 919,71.31 963.84,116.16 U8.19@963.84,181.69
  Signal w5: CN9.26@100,-700 229,-700 247,-682 382,-682 503,-561 638,-561 675.79,-523.21 749,-523.21 920,-352.21 v2@920,-118
PF8: CN9.24 CN11.54 U8.20 | length 2173.3
  Top Layer w5: v2(941,-162) 942,-162 942,72.74 983.53,114.27 U8.20@983.53,181.69
  Signal w5: CN11.54@-200,-796.79 CN11.54@-200,-800 -252,-748 -252,-673 -221.03,-642.03 57.97,-642.03 CN9.24@100,-600 ; v2(198,-741) 361,-741 501,-601 692.43,-601 942,-351.43 942,-162 v2(941,-162)
  Bottom Layer w5: CN9.24@100,-600 198,-698 v2(198,-741)
PF9: CN9.28 CN11.56 U8.21 | length 1941.7
  Top Layer w5: CN11.56@-200,-900 -157.03,-857.03 23.31,-857.03 75.48,-804.86 95.14,-804.86 CN9.28@100,-800 ; v2(962,-191) 960.1,-189.1 960.1,68.1 1001.5,109.5 1001.5,143.49 1003.21,145.2 U8.21@1003.21,181.69
  Signal w5: CN9.28@100,-800 335.25,-800 520.25,-615 699.64,-615 962,-352.64 v2(962,-191)
PF10: CN12.42 SB10.1 SB157.2 U8.22 | length 1750.3
  Top Layer w5: v1@1022.9,134 U8.22@1022.9,181.69 ; v1(1642,14.7) 1642,-104.59 1586.25,-160.34 SB10.1@1586.25,-200 1586.25,-223.95 1588.9,-226.6 1590.04,-226.6 1601.4,-237.96 1601.4,-239.1 1614.3,-252 1824,-252 1849,-227 1849,-177 1868.03,-157.97 1917.41,-157.97 1917.46,-158.03 2157.03,-158.03 CN12.42@2200,-201
  Bottom Layer w5: SB157.2@978.75,134 1022.9,134 1042.4,153.5 1503.2,153.5 v1(1642,14.7)
  other v1: 1022,135
PF11: CN12.62 U8.49 | length 2348.9
  Top Layer w5: U8.49@1372.31,491.73 1415.72,491.73 1421.51,485.95 1663.15,485.95 1664,485.1 v2(1664,485.95)
  Signal w5: v2(1664,485.95) 1677.1,472.85 1677.1,-448.35 1734.2,-505.45 1734.2,-522.85 1768.37,-557.03 1935.37,-557.03 1951,-572.66 1951,-882.34 2016.5,-947.84 2016.5,-1097.5 2064,-1145 2144,-1145 CN12.62@2200,-1201
PF12: CN7.20 CN12.59 U8.50 | length 2996.9
  Top Layer w5: v2(1307.2,606) 1298.5,597.3 1298.5,531.5 1318.58,511.42 U8.50@1372.31,511.42
  Signal w5: v2@1591.3,724 v2(1594,724) 1647.1,670.9 1647.1,529.74 1693.06,483.79 1693.06,-434.06 1753.17,-494.17 1753.17,-516.95 1777.21,-541 1943.56,-541 1943.96,-541.4 1945.4,-541.4 1968,-564 1968,-879.68 2038,-949.68 2038,-1016.94 2100,-1078.94 CN12.59@2100,-1101
  Bottom Layer w5: v2(1307.2,606) 1479.06,606 v2@1597.06,724 ; v2(1594,724) v2@1597.06,724 ; CN7.20@1900,860 1857,817 1708,817 1615,724 v2@1597.06,724
PF13: CN10.2 CN12.57 U8.53 | length 2555.5
  Top Layer w5: U8.53@1372.31,570.47 1423.9,570.47 1436.61,583.19 1676.81,583.19 v2(1700,560)
  Signal w5: v2(1700,560) 1737.5,522.5 1737.5,-317.5 1762.03,-342.03 1817.41,-342.03 ; 1817.44,-342 1881.56,-342 ; 1881.59,-342.03 1910.03,-342.03 1983,-415 1983,-875.03 2100,-992.03 CN12.57@2100,-1001
  Bottom Layer w5: v2(1700,560) 1719.05,579.05 1719.05,738.67 1738.39,758 1842,758 CN10.2@1900,700
PF14: CN10.8 CN12.50 U8.54 | length 2089.2
  Top Layer w5: U8.54@1372.31,590.16 1420.36,590.16 1428.39,598.19 1694.81,598.19 1737.5,555.5 1737.5,470.5 1759,449 1851,449 CN10.8@1900,400
  Signal w5: v1(2190.64,451) 2221,451 2246.83,425.17 2246.83,407.17 2247,407 2247,-554 CN12.50@2200,-601
  Bottom Layer w5: CN10.8@1900,400 1987,400 2038,451 v1(2190.64,451) v1@2192,452.36
PF15: CN10.12 CN12.60 U8.55 | length 2713.6
  Top Layer w5: U8.55@1372.31,609.84 1418.83,609.84 1422.18,613.19 1572.87,613.19 1608.9,649.21 v2(1609,649.21) ; v2(1851,-672) 1850,-673 1850,-835 1868,-853 1943,-853 2008,-918 2008,-1005 2050.65,-1047.65 2146.65,-1047.65 CN12.60@2200,-1101
  Signal w5: v2(1609,649.21) 1619.3,638.91 1619.3,209.7 v2(1624,205) ; v2@1621.5,205 1621.5,-2.29 1647,-27.79 1647,-457.56 1706.4,-516.96 1706.4,-611.06 1752.37,-657.03 1836.03,-657.03 v2(1851,-672)
  Bottom Layer w5: v2(1624,205) 1621.5,205 1630.39,213.89 1736.92,213.89 1766,242.97 1857.03,242.97 CN10.12@1900,200
PG0: CN9.29 CN11.59 U8.56 | length 4158.2
  Top Layer w5: CN11.59@-300,-1100 -248,-1048 -248,-981 -221,-954 -185.07,-954 -131.07,-900 CN9.29@0,-900 48,-852 159,-852 187,-880 v2(187,-881) ; U8.56@1373.44,628.4 1558,628.4 v2(1578,648.4) ; v2(1655,-524) 1655,-566.7 1749,-660.7 v2(1749,-963)
  Signal w5: v2(187,-881) 187,-880 187.1,-879.9 1041.29,-879.9 1153.49,-992.1 1719.9,-992.1 v2(1749,-963) ; v2(1578,648.4) 1605.1,621.3 1605.1,-7.1 1632,-34 1632,-501 v2(1655,-524)
PG1: CN9.30 CN11.58 U8.57 | length 3912
  Top Layer w5: U8.57@1372.31,649.21 v2@1547.37,649.21 ; v2(1615,-524) 1615,-560.7 1733.4,-679.1 1733.4,-924.6 v2(1717,-941)
  Signal w5: CN11.58@-200,-1000 -199,-1000 -50,-851 51,-851 CN9.30@100,-900 158,-842 1117.9,-842 1216.9,-941 v2(1717,-941) ; v2(1548.19,648.4) 1591.2,605.38 1591.2,-12.86 1591.8,-13.46 1591.8,-17.8 1614,-40 1614,-523 v2(1615,-524)
PG2: CN8.14 CN11.42 U8.87 | length 2916.8
  Top Layer w5: CN11.42@-200,-200 -129,-129 -129,713.5 -84.53,757.97 57.97,757.97 CN8.14@100,800 ; v1(992,1298) 1006,1284 1006,1099.36 1022.9,1082.46 U8.87@1022.9,1018.31
  Bottom Layer w5: CN8.14@100,800 161,861 161,1069.43 227.47,1135.89 227.47,1304.12 339.24,1415.9 545.1,1415.9 644,1317 973,1317 v1(992,1298)
PG3: CN8.16 CN11.44 U8.88 | length 3047.6
  Top Layer w5: CN11.44@-200,-300 -109,-209 -109,688 -54.97,742.03 57.97,742.03 CN8.16@100,700 ; v2(956,1297) 956,1125 1004.03,1076.97 U8.88@1004.03,1019.12
  Bottom Layer w5: CN8.16@100,700 179,779 179,1066.21 242.47,1129.68 242.47,1299.47 345,1402 517,1402 621,1298 704,1298 726,1276 935,1276 v2(956,1297)
PG4: CN12.69 U8.89 | length 3635
  Top Layer w5: v1@983,1065.94 v1(983.53,1065.41) U8.89@983.53,1018.31
  Signal w5: v1(983.53,1065.41) 916.62,998.5 900.03,998.5 850.85,949.32 850.85,661.54 1018.69,493.7 1386.8,493.7 1451.4,429.1 1451.4,-304.1 1510.51,-363.21 1510.51,-791.04 v2(1526.47,-807)
  Bottom Layer w5: v2(1526.47,-807) 1526.47,-879.22 1615.25,-968 1615.25,-1326.25 1890,-1601 CN12.69@2100,-1601
PG5: CN12.68 U8.90 | length 3645.7
  Top Layer w5: U8.90@963.84,1018.31 963.84,963.16 v1(964,963) v1@964,959.3
  Signal w5: v1(964,963) 943.5,983.5 906.24,983.5 864.75,942.01 864.75,667.3 1024.44,507.6 1392.56,507.6 1465.3,434.86 1465.3,-298.34 1524.41,-357.46 1524.41,-778.21 1550.4,-804.2 v2(1550.4,-827.47)
  Bottom Layer w5: v2(1550.4,-827.47) 1550.4,-875.65 1635.75,-961 1635.75,-1292.75 1894,-1551 2150,-1551 CN12.68@2200,-1501
PG6: CN12.70 SB186.1 SB187.1 U8.91 | length 7555.5
  Top Layer w5: U8.91@944.16,1018.31 v1(944.16,1066.16)
  Signal w5: v2(194,-1719.19) 347.81,-1719.19 v2(348.5,-1718.5) ; v1(944.16,1066.16) 836.95,958.95 836.95,655.78 1039.55,453.18 1330.94,453.18 1360.11,424 1360.11,423.65 1435,348.76 1435,-307.36 1496.61,-368.97 1496.61,-821.61 v2(1505,-830)
  Bottom Layer w5: SB187.1@151,-1719.19 v2(194,-1719.19) SB186.1@236,-1719.19 ; v2(348.5,-1718.5) 348.5,-1402.5 380.35,-1370.65 380.35,-803.15 459,-724.5 459,8 396,71 331.38,71 283.8,118.58 283.8,909.8 388.27,1014.27 547.97,1014.27 566,996.24 738.33,996.24 853.08,1111 924.47,1111 944.16,1091.32 v1(944.16,1066.16) ; v2(1505,-830) 1505,-884 1592,-971 1592,-1344 1896,-1648 2153,-1648 CN12.70@2200,-1601
PG7: CN12.67 JP4.2 U8.92 | length 4014.3
  Top Layer w5: JP4.2@700,1500 800.94,1500 923.66,1377.28 923.66,1019.12 U8.92@924.47,1018.31 v1(924.47,963)
  Signal w5: v1(924.47,963) 906.95,963 878.65,934.69 878.65,673.05 1030.2,521.5 1398.32,521.5 1479.2,440.62 1479.2,-292.59 1538.31,-351.7 1538.31,-765.16 v2(1569,-795.84)
  Bottom Layer w5: v2(1569,-795.84) 1569.3,-796.14 1569.3,-835.3 1569,-835.6 1569,-872.75 1656.25,-960 1656.25,-1245.28 1911.97,-1501 CN12.67@2100,-1501
PG8: CN12.66 U8.93 | length 3459.7
  Top Layer w5: U8.93@903.97,1017.49 v1(903.97,931.03) v1@906,929
  Signal w5: v1(903.97,931.03) 892.55,919.6 892.55,681.14 1000.49,573.2 1449.14,573.2 1493.1,529.24 1493.1,-286.83 1552.21,-345.94 1552.21,-745.54 1591.2,-784.53 v2(1591.2,-825)
  Bottom Layer w5: v2(1591.2,-825) 1591.2,-873.1 1676.1,-958 1676.1,-1199.1 1927,-1450 2151,-1450 CN12.66@2200,-1401
PG9: CN11.63 SB130.1 SB134.1 U8.124 | length 2882.4
  Top Layer w5: CN11.63@-300,-1300 -259.07,-1259.07 -135.98,-1259.07 -115.81,-1238.9 263.1,-1238.9 v2(402,-1100) ; v1(445,632) 478,632 495.21,649.21 U8.124@535.69,649.21
  Bottom Layer w5: v2(402,-1100) 426,-1076 426,-805.72 466.72,-765 467,-765 491,-741 491,519 479.68,530.32 455.96,530.32 445,541.28 v1(445,632) 447,630 SB134.1@480,630 480,691 435,736 SB130.1@435,773.25
PG10: CN11.66 SB135.1 U8.125 | length 2775
  Top Layer w5: CN11.66@-200,-1400 -109,-1400 -15,-1306 344,-1306 v2(401,-1249) ; U8.125@535.69,629.53 v1@584.26,629.53
  Bottom Layer w5: v2(401,-1249) 430.26,-1249 536,-1143.26 536,393 639,496 639,575.73 v1(584.73,630) SB135.1@539,630
PG11: CN11.70 SB183.1 U8.126 | length 3425.7
  Top Layer w5: v2(158,515) 159,515 253.84,609.84 U8.126@535.69,609.84
  Bottom Layer w5: SB183.1@-41.75,-1600 CN11.70@-200,-1600 -248.5,-1551.5 -358.5,-1551.5 -398,-1512 -398,519 -365,552 -336.4,552 -315.79,552 121,552 v2(158,515)
PG12: CN11.65 U8.127 | length 2728.8
  Top Layer w5: CN11.65@-300,-1400 -247,-1347 -111,-1347 -30.7,-1266.7 334.3,-1266.7 v2(401,-1200) ; U8.127@535.69,590.16 v1@581.84,590.16
  Bottom Layer w5: v2(401,-1200) 521,-1080 521,399.28 624,502.28 624,547 v1(582,589)
PG13: CN11.68 SB182.1 U8.128 | length 2903.2
  Top Layer w5: v1@164,186 v1(164.5,186.5) 199,221 199,435 327,563 461.21,563 468.69,570.47 U8.128@535.69,570.47
  Bottom Layer w5: SB182.1@-41.75,-1500 CN11.68@-200,-1500 -250,-1450 -250,129.99 -230.99,149 127,149 v1(164.5,186.5)
PG14: CN12.61 SB131.1 U8.129 | length 3813.1
  Top Layer w5: U8.129@535.69,550.79 573.8,550.79 607.9,584.89 607.9,757.1 v1(592,773) ; v2(1747,-1201) CN12.61@2100,-1201
  Signal w5: v2(555,-1006) 1552,-1006 v2(1747,-1201)
  Bottom Layer w5: SB131.1@539,773.25 591.75,773.25 v1(592,773) 654,711 654,489.79 551,386.79 551,-999 558,-1006 v2(555,-1006)
PG15: CN11.64 U8.132 | length 2429.8
  Top Layer w5: CN11.64@-200,-1300 -118,-1300 -70.8,-1252.8 297.2,-1252.8 v2(401,-1149) ; U8.132@535.69,491.73 v1(584.46,491.73)
  Bottom Layer w5: v2(401,-1149) 506,-1044 506,414.07 v1@584.46,492.54
PH0: SB8.2 SB148.1 SB149.2 U8.23 | length 296.3
  Top Layer w5: SB8.2@1022.99,66.5 1039.5,83 1039.5,122.49 1043.4,126.39 1043.4,180.88 U8.23@1042.58,181.69 v1(1042.58,232)
  Bottom Layer w5: SB148.1@1013.7,271.25 SB149.2@1072.7,271.25 1072.7,243.86 1060.84,232 v1(1042.58,232) v1@1043,232.42
PH1: SB9.2 SB163.1 U8.24 | length 213.7
  Top Layer w5: v1(1060,114) 1067,107 1067,81.74 SB9.2@1081.99,66.75 ; v1@1061.45,115.45 U8.24@1061.45,180.88
  Bottom Layer w5: SB163.1@1003,69.75 1003,97 1019,113 v1@1061,113
PH2: CN11.67 SB123.2 | length 3748.8
  Top Layer w5: CN11.67@-300,-1500 -249,-1449 -99,-1449 2,-1348 v2(331,-1348)
  Bottom Layer w5: v2(331,-1348) 331,-799 424,-706 424,-6.5 382.83,34.67 318.21,34.67 251,101.88 251,1011 320.25,1080.25 320.25,1244.25 360,1284 498,1284 511,1271 SB123.2@511,1197.75
RD_N: R53.1 U9.22 U10.6 U11.8 | length 704.3
  Top Layer w5.1: R53.1@822.09,-936.4 U10.6@883.07,-936.4 v1(883.07,-976.93) ; U9.22@959.84,-749.12 959.84,-766.15 961.69,-767.99 961.69,-795.92 975.01,-809.24 v2(975.01,-815.29) ; U11.8@1022,-1120.44 1022,-1090.15 1064.5,-1047.65 1064.5,-1043.5 v1(1059,-1038)
  Bottom Layer w5.1: v1(883.07,-976.93) 939.07,-976.93 948.82,-967.18 ; v2(975.01,-815.29) 982.54,-815.29 1004,-836.75 1004,-848 943,-909 943,-961.36 948.82,-967.18 ; v1(1059,-1038) 1063.93,-1033.07 1063.93,-1011.14 1042.79,-990 971.64,-990 948.82,-967.18